# EAGLE board main_brd (EAGLE 6.5.0)
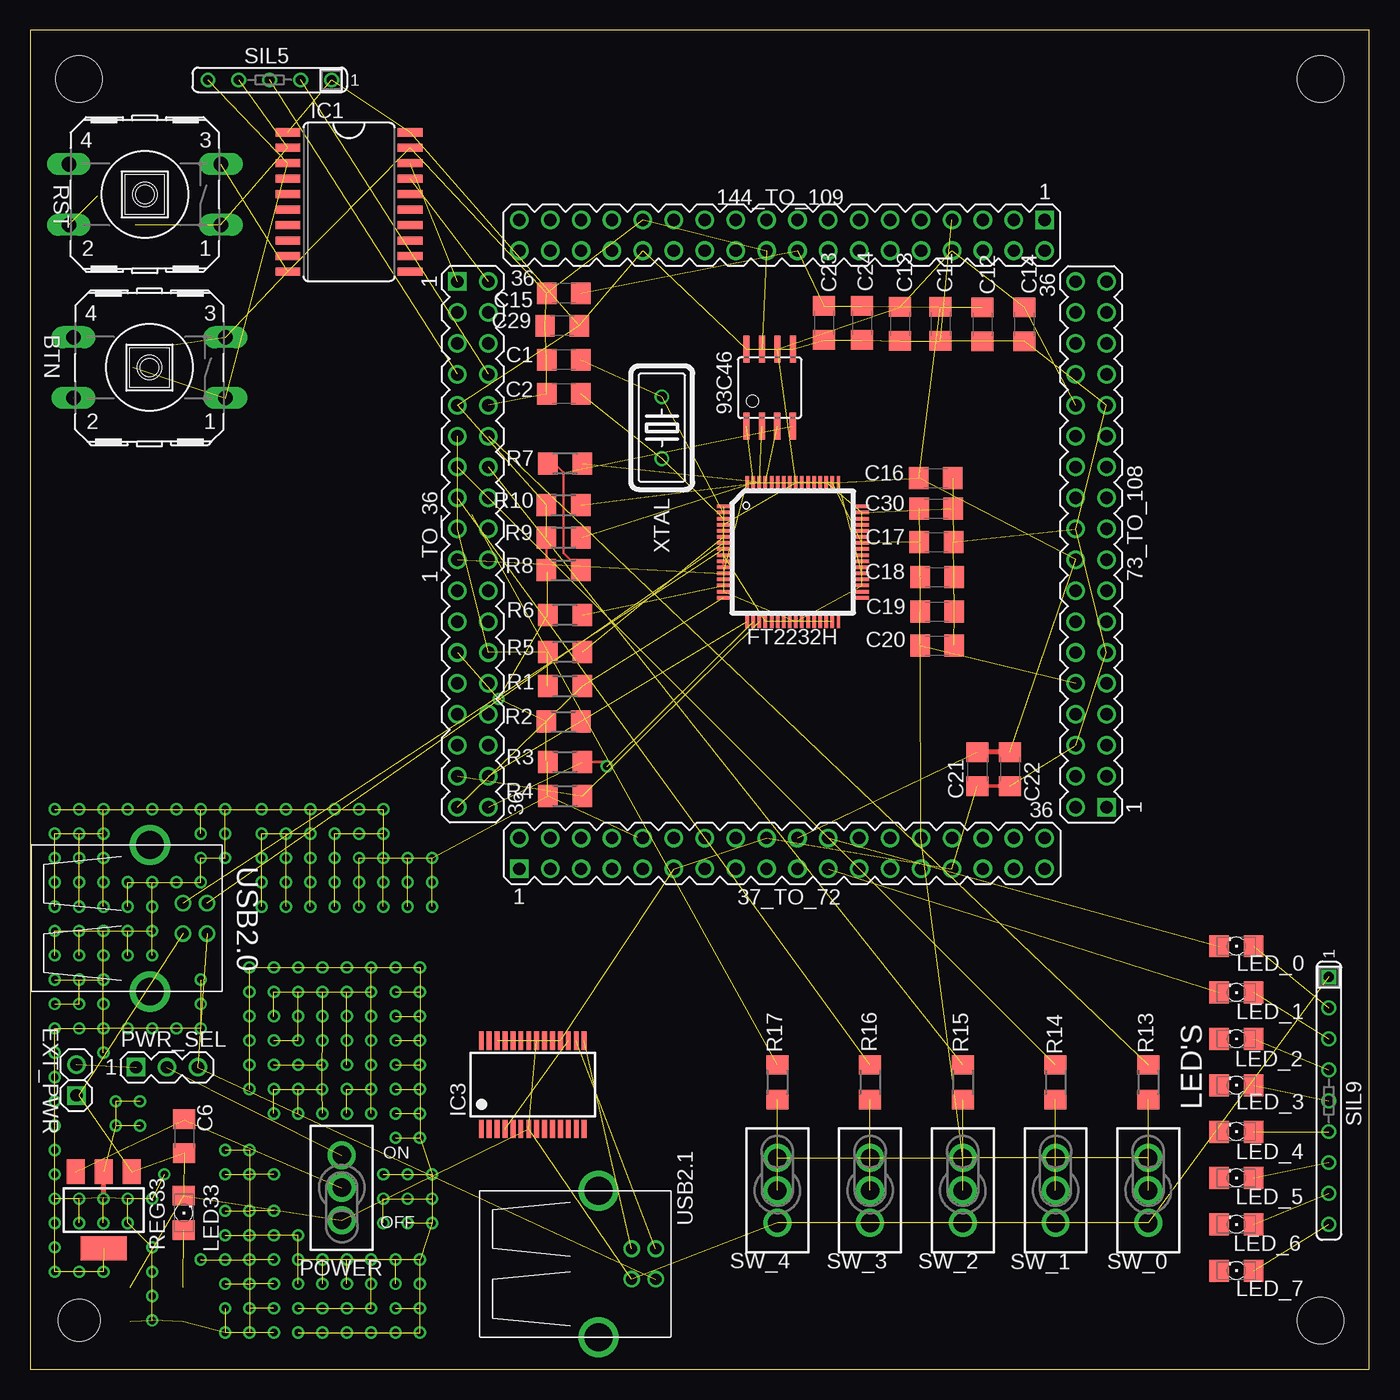
[diagram p0: board, top side]
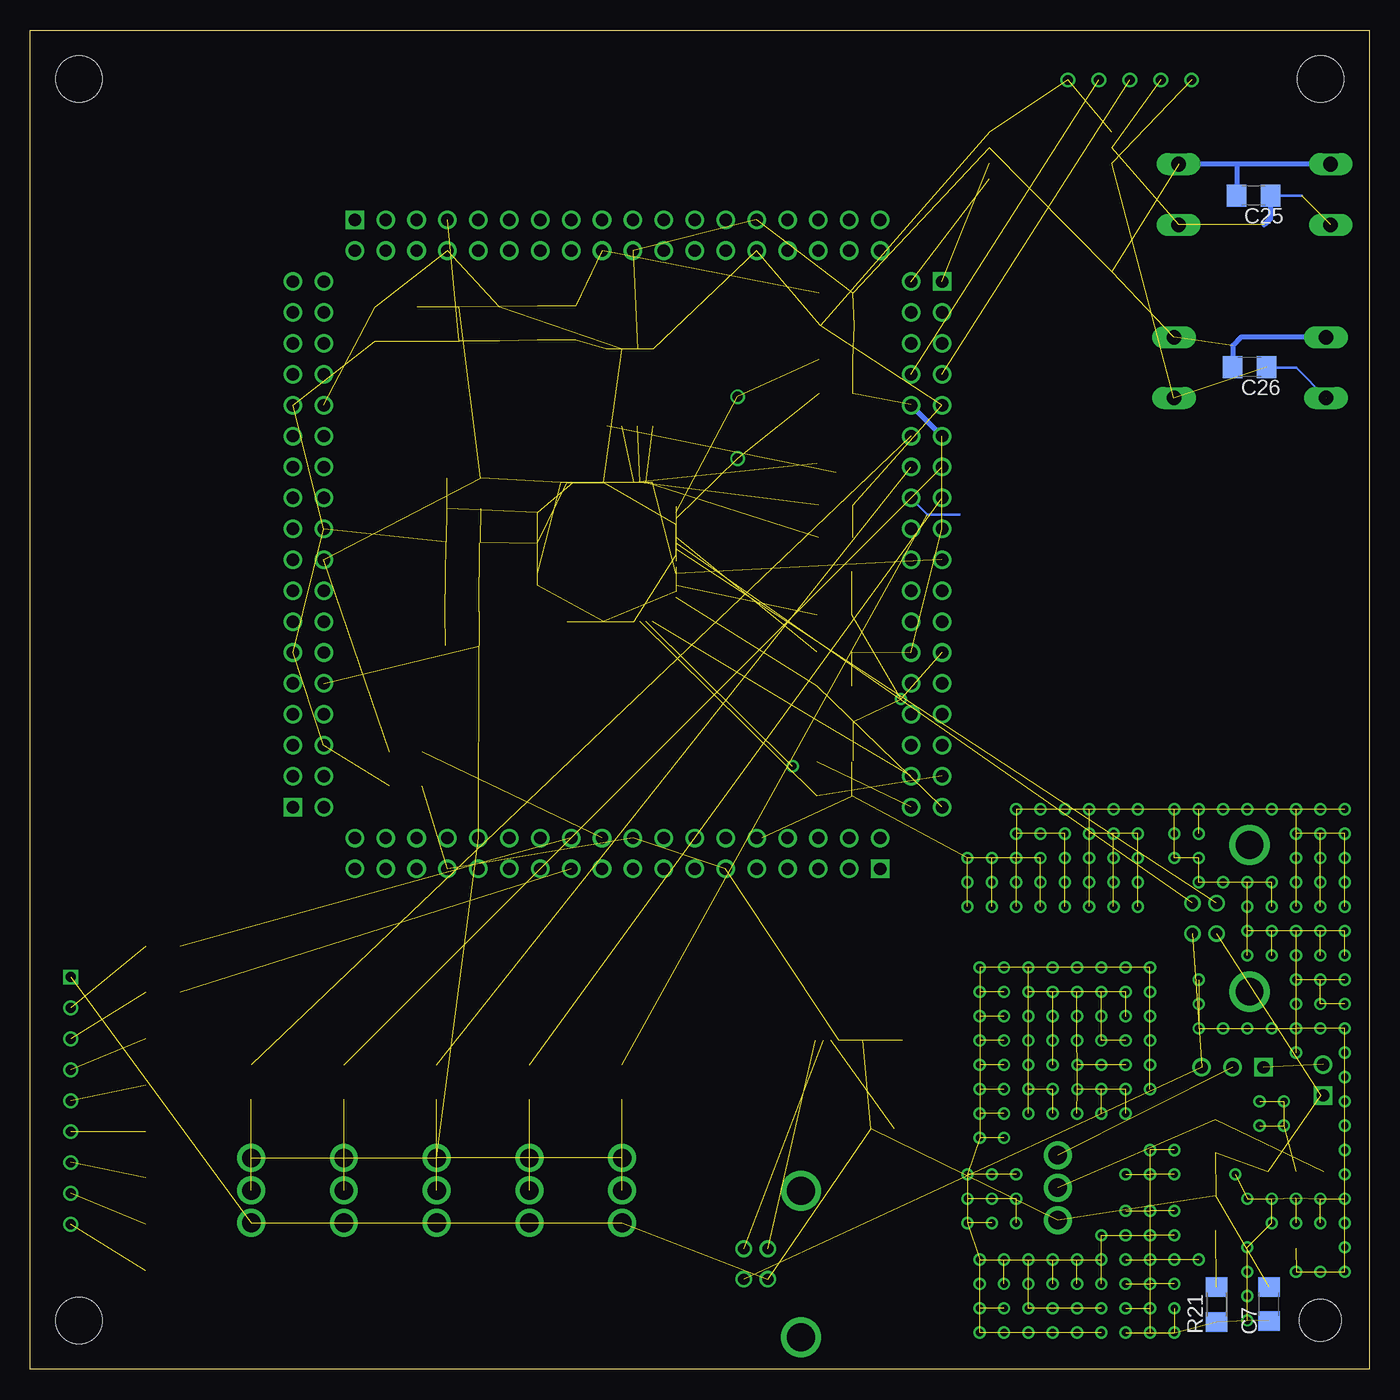
[diagram p1: board, bottom side, seen from below]

Size 110 x 110 mm. Coordinates in mm from the lower left corner, seen from the top.
Outline: 0,0 110,0 110,110 0,110 0,0
Copper layers (1*16): Top 0.07mm / dielectric 1.5mm / Bottom 0.07mm
Design rules "default *": minimum track width 8mil, minimum drill 23mil, track to track 10mil, track to pad 8mil, pad to pad 8mil, via to via 8mil, smd to smd 8mil, copper to edge 40mil, drill to drill 10mil, minimum pad ring 8mil, minimum via ring 8mil, stop-mask expansion 4mil, vias tented up to drill 0mil, thermal gap 10mil
Holes 3.43 mm at 4,4
Holes 3.81 mm at 106,4 106,106 4,106

## Footprints (pad centres in the part's own frame; a part is rotated, then mirrored left to right if it is on the bottom)
MA18-2 = drill 1.016 square: 1 -21.59,-1.27 | drill 1.016: 2 -21.59,1.27; 3 -19.05,-1.27; 4 -19.05,1.27; 5 -16.51,-1.27; 6 -16.51,1.27; 7 -13.97,-1.27; 8 -13.97,1.27; 9 -11.43,-1.27; 10 -11.43,1.27; 11 -8.89,-1.27; 12 -8.89,1.27; 13 -6.35,-1.27; 14 -6.35,1.27; 15 -3.81,-1.27; 16 -3.81,1.27; 17 -1.27,-1.27; 18 -1.27,1.27; 19 1.27,-1.27; 20 1.27,1.27; 21 3.81,-1.27; 22 3.81,1.27; 23 6.35,-1.27; 24 6.35,1.27; 25 8.89,-1.27; 26 8.89,1.27; 27 11.43,-1.27; 28 11.43,1.27; 29 13.97,-1.27; 30 13.97,1.27; 31 16.51,-1.27; 32 16.51,1.27; 33 19.05,-1.27; 34 19.05,1.27; 35 21.59,-1.27; 36 21.59,1.27
SOIC8 = smd 0.5 x 2.2: 1 -1.905,-3.154; 2 -0.645,-3.154; 3 0.625,-3.154; 4 1.895,-3.154; 5 1.905,3.154; 6 0.635,3.154; 7 -0.635,3.154; 8 -1.905,3.154
RACON12 = drill 1.194 long: 1 -6.248,2.489; 2 6.248,2.489; 3 -6.248,-2.489; 4 6.248,-2.489
C1206 = smd 1.6 x 1.8: 1 -1.4,0; 2 1.4,0
1X02 = drill 1.016 square: 1 -1.27,0 | drill 1.016: 2 1.27,0
LQFP_NEW = smd 1.1 x 0.285: 1 -5.7,3.75; 2 -5.7,3.25; 3 -5.7,2.75; 4 -5.7,2.25; 5 -5.7,1.75; 6 -5.7,1.25; 7 -5.7,0.75; 8 -5.7,0.25; 9 -5.7,-0.25; 10 -5.7,-0.75; 11 -5.7,-1.25; 12 -5.7,-1.75; 13 -5.7,-2.25; 14 -5.7,-2.75; 15 -5.7,-3.25; 16 -5.7,-3.75; 33 5.7,-3.75; 34 5.7,-3.25; 35 5.7,-2.75; 36 5.7,-2.25; 37 5.7,-1.75; 38 5.7,-1.25; 39 5.7,-0.75; 40 5.7,-0.25; 41 5.7,0.25; 42 5.7,0.75; 43 5.7,1.25; 44 5.7,1.75; 45 5.7,2.25; 46 5.7,2.75; 47 5.7,3.25; 48 5.7,3.75 | smd 0.285 x 1.1: 17 -3.75,-5.7; 18 -3.25,-5.7; 19 -2.75,-5.7; 20 -2.25,-5.7; 21 -1.75,-5.7; 22 -1.25,-5.7; 23 -0.75,-5.7; 24 -0.25,-5.7; 25 0.25,-5.7; 26 0.75,-5.7; 27 1.25,-5.7; 28 1.75,-5.7; 29 2.25,-5.7; 30 2.75,-5.7; 31 3.25,-5.7; 32 3.75,-5.7; 49 3.75,5.7; 50 3.25,5.7; 51 2.75,5.7; 52 2.25,5.7; 53 1.75,5.7; 54 1.25,5.7; 55 0.75,5.7; 56 0.25,5.7; 57 -0.25,5.7; 58 -0.75,5.7; 59 -1.25,5.7; 60 -1.75,5.7; 61 -2.25,5.7; 62 -2.75,5.7; 63 -3.25,5.7; 64 -3.75,5.7
SO20W = smd 0.66 x 2.032: 1 -5.715,-5.029; 2 -4.445,-5.029; 3 -3.175,-5.029; 4 -1.905,-5.029; 5 -0.635,-5.029; 6 0.635,-5.029; 7 1.905,-5.029; 8 3.175,-5.029; 9 4.445,-5.029; 10 5.715,-5.029; 11 5.715,5.029; 12 4.445,5.029; 13 3.175,5.029; 14 1.905,5.029; 15 0.635,5.029; 16 -0.635,5.029; 17 -1.905,5.029; 18 -3.175,5.029; 19 -4.445,5.029; 20 -5.715,5.029
SSOP28 = smd 0.4 x 1.5: 1 -4.225,-3.625; 2 -3.575,-3.625; 3 -2.925,-3.625; 4 -2.275,-3.625; 5 -1.625,-3.625; 6 -0.975,-3.625; 7 -0.325,-3.625; 8 0.325,-3.625; 9 0.975,-3.625; 10 1.625,-3.625; 11 2.275,-3.625; 12 2.925,-3.625; 13 3.575,-3.625; 14 4.225,-3.625; 15 4.225,3.625; 16 3.575,3.625; 17 2.925,3.625; 18 2.275,3.625; 19 1.625,3.625; 20 0.975,3.625; 21 0.325,3.625; 22 -0.325,3.625; 23 -0.975,3.625; 24 -1.625,3.625; 25 -2.275,3.625; 26 -2.925,3.625; 27 -3.575,3.625; 28 -4.225,3.625
1206 = smd 1.6 x 1.803: A -1.422,0; C 1.422,0
TL3XPO = drill 1.524 pad 2.032: 1 -2.667,0; 2 0,0; 3 2.667,0
MA03-1 = drill 1.016 square: 1 -2.54,0 | drill 1.016: 2 0,0; 3 2.54,0
R1206 = smd 1.6 x 1.803: 1 -1.422,0; 2 1.422,0
SOT223 = smd 1.5 x 2: 1 -2.3,-3.15; 2 0,-3.15; 3 2.3,-3.15 | smd 3.8 x 2: 4 0,3.15
SIL5 = drill 0.813: 1 -5.08,0; 2 -2.54,0; 3 0,0; 4 2.54,0; 5 5.08,0
SIL9 = drill 0.813 square: 1 -10.16,0 | drill 0.813: 2 -7.62,0; 3 -5.08,0; 4 -2.54,0; 5 0,0; 6 2.54,0; 7 5.08,0; 8 7.62,0; 9 10.16,0
USB-B-H = drill 0.914: D+ 0,1.25; D- 1.981,1.25; GND 0,-1.25; VBUS 1.981,-1.25 | drill 2.286: P$1 -2.718,-6.02; P$2 -2.718,6.02
HC18U-V = drill 0.813: 1 -2.54,0; 2 2.54,0

## Placement (x,y rotation side)
1_TO_36  [MA18-2]  36.36,67.77 270 top
37_TO_72  [MA18-2]  61.76,42.37 0 top
73_TO_108  [MA18-2]  87.16,67.77 90 top
93C46  [SOIC8]  60.74,80.65 0 top
144_TO_109  [MA18-2]  61.76,93.17 180 top
BTN  [RACON12]  9.78,82.3 180 top
C1  27pf  [C1206]  43.81,82.93 180 top
C2  27pf  [C1206]  43.81,80.14 180 top
C6  100nf  [C1206]  12.64,19.16 270 top
C7  100nf  [C1206]  8.22,5.33 90 bottom
C11  3.3uf  [C1206]  74.78,85.88 270 top
C12  3.3uf  [C1206]  78.23,85.85 270 top
C13  4.7uf  [C1206]  71.45,85.88 270 top
C14  4.7uf  [C1206]  81.66,85.85 270 top
C15  4.7uf  [C1206]  43.81,88.39 180 top
C16  4.7uf  [C1206]  74.4,73.23 0 top
C17  100nf  [C1206]  74.45,67.94 0 top
C18  100nf  [C1206]  74.5,65.07 0 top
C19  100nf  [C1206]  74.52,62.26 0 top
C20  100nf  [C1206]  74.5,59.46 0 top
C21  100nf  [C1206]  77.8,49.3 270 top
C22  100nf  [C1206]  80.49,49.3 270 top
C23  100nf  [C1206]  65.2,85.95 270 top
C24  100nf  [C1206]  68.33,85.95 270 top
C25  10uf  [C1206]  9.48,96.43 180 bottom
C26  10uf  [C1206]  9.82,82.33 180 bottom
C29  3.3uf  [C1206]  43.69,85.72 180 top
C30  3.3uf  [C1206]  74.42,70.71 0 top
EXT_PWR  [1X02]  3.77,23.76 90 top
FT2232H  FT2232H  [LQFP_NEW]  62.65,67.14 0 top
IC1  74LS245DW  [SO20W]  26.18,95.9 270 top
IC3  FT232RL  [SSOP28]  41.27,23.37 0 top
LED33  [1206]  12.61,12.83 90 top
LED_0  [1206]  99.1,34.75 180 top
LED_1  [1206]  99.1,30.94 180 top
LED_2  [1206]  99.1,27.13 180 top
LED_3  [1206]  99.1,23.32 180 top
LED_4  [1206]  99.1,19.51 180 top
LED_5  [1206]  99.1,15.7 180 top
LED_6  [1206]  99.1,11.89 180 top
LED_7  [1206]  99.1,8.08 180 top
POWER  [TL3XPO]  25.58,14.9 90 top
PWR_SEL  [MA03-1]  11.21,24.79 0 top
R1  1k  [R1206]  43.93,56.12 180 top
R2  10k  [R1206]  43.8,53.2 180 top
R3  10k  [R1206]  43.93,49.9 180 top
R4  10k  [R1206]  43.93,47.1 180 top
R5  12k  [R1206]  43.93,58.91 0 top
R6  1k  [R1206]  43.93,61.96 0 top
R7  2.2k  [R1206]  43.93,74.41 0 top
R8  10k  [R1206]  43.8,65.64 180 top
R9  10k  [R1206]  43.81,68.33 180 top
R10  10k  [R1206]  43.81,70.99 180 top
R13  10k  [R1206]  91.86,23.58 90 top
R14  10k  [R1206]  84.24,23.58 90 top
R15  10k  [R1206]  76.62,23.58 90 top
R16  10k  [R1206]  69,23.58 90 top
R17  10k  [R1206]  61.38,23.58 90 top
R21  470  [R1206]  12.53,5.3 90 bottom
REG33  [SOT223]  6.03,13.07 180 top
RST  [RACON12]  9.4,96.52 180 top
SIL5  10k  [SIL5]  19.66,105.93 180 top
SIL9  470  [SIL9]  106.69,22.05 270 top
SW_0  [TL3XPO]  91.86,14.69 270 top
SW_1  [TL3XPO]  84.24,14.69 270 top
SW_2  [TL3XPO]  76.62,14.69 270 top
SW_3  [TL3XPO]  69,14.69 270 top
SW_4  [TL3XPO]  61.38,14.69 270 top
USB2.0  [USB-B-H]  12.53,37.04 0 top
USB2.1  [USB-B-H]  49.4,8.64 0 top
XTAL  16MHz  [HC18U-V]  51.88,77.35 90 top

## Library data of the parts
1_TO_36 37_TO_72 73_TO_108 144_TO_109 PWR_SEL = con-lstb; OC_FARNELL: unknown; OC_NEWARK: unknown
93C46 = atmel
BTN RST = switch-misc
C1 C2 C6 C7 C25 C26 R1-R10 R13-R17 R21 = resistor
C11-C24 C29 C30 = rcl
EXT_PWR = pinhead
FT2232H = ft2232h_lqfp64
IC1 = 74xx-us
IC3 = ftdichip; MPN: FT232RL; OC_FARNELL: 1146032; OC_NEWARK: 91K9918
LED33 LED_0 LED_1-LED_7 = led
POWER SW_0 SW_1-SW_4 = switch
REG33 = v-reg
SIL5 = resistor-sil; OC_FARNELL: unknown; OC_NEWARK: unknown
SIL9 = resistor-sil
USB2.0 USB2.1 = con-usb-3
XTAL = crystal; OC_FARNELL: unknown; OC_NEWARK: unknown

## Nets
32: 1_TO_36.32
49: LED_7.C
50: LED_6.C
51: LED_5.C
52: LED_4.C
53: LED_3.C
55: LED_2.C
57: 37_TO_72.21 LED_1.C
58: 37_TO_72.22 LED_0.C
59: 37_TO_72.23
60: 37_TO_72.24
61: 37_TO_72.25
62: 37_TO_72.26
63: 37_TO_72.27
66: 37_TO_72.30
67: 37_TO_72.31
68: 37_TO_72.32
70: 37_TO_72.34
72: 37_TO_72.36
124: 144_TO_109.16
125: 144_TO_109.17
BTN: BTN.1 BTN.2 C26.1 IC1.3 SIL5.5
BTN_0: 1_TO_36.1 IC1.18
BTN_1: 1_TO_36.2 IC1.17
CLK_1: 1_TO_36.18
D+: FT2232H.8 USB2.0.D+
D-: FT2232H.7 USB2.0.D-
EECLK: 93C46.2 FT2232H.62 R10.1
EECS: 93C46.1 FT2232H.63 R9.1
EEDATA: 93C46.3 FT2232H.61 R7.2
EN_0: 144_TO_109.22
EN_1: 144_TO_109.36
EN_2: 37_TO_72.1
EN_3: 37_TO_72.15
EN_4: 144_TO_109.25
EN_5: 144_TO_109.30
EN_6: 144_TO_109.33
EN_7: 37_TO_72.4
EN_8: 37_TO_72.7
EN_9: 37_TO_72.12
ENC_A_0: 73_TO_108.25
ENC_A_1: 73_TO_108.23
ENC_A_2: 73_TO_108.21
ENC_A_3: 73_TO_108.16
ENC_A_4: 73_TO_108.14
ENC_A_5: 73_TO_108.12
ENC_A_6: 73_TO_108.8
ENC_A_7: 73_TO_108.5
ENC_A_8: 73_TO_108.3
ENC_A_9: 73_TO_108.1
ENC_B_0: 73_TO_108.26
ENC_B_1: 73_TO_108.24
ENC_B_2: 73_TO_108.22
ENC_B_3: 73_TO_108.19
ENC_B_4: 73_TO_108.15
ENC_B_5: 73_TO_108.13
ENC_B_6: 73_TO_108.9
ENC_B_7: 73_TO_108.7
ENC_B_8: 73_TO_108.4
ENC_B_9: 73_TO_108.2
GND: 1_TO_36.10 1_TO_36.11 1_TO_36.17 1_TO_36.26 37_TO_72.11 37_TO_72.18 37_TO_72.29 73_TO_108.6 73_TO_108.11 73_TO_108.20 73_TO_108.27 93C46.5 93C46.7 144_TO_109.7 144_TO_109.20 144_TO_109.27 BTN.3 BTN.4 C1.2 C2.2 C6.2 C7.2 C11.2 C12.2 C13.2 C14.2 C15.2 C16.2 C17.2 C18.2 C19.2 C20.2 C21.2 C22.2 C23.2 C24.2 C25.2 C26.2 C29.2 C30.2 EXT_PWR.1 FT2232H.1 FT2232H.5 FT2232H.10 FT2232H.11 FT2232H.13 FT2232H.15 FT2232H.25 FT2232H.35 FT2232H.47 FT2232H.51 IC1.10 IC1.19 IC3.7 IC3.18 IC3.21 IC3.25 IC3.26 LED33.C POWER.1 R1.2 R5.1 REG33.1 RST.3 RST.4 SIL9.1 SW_0.3 SW_1.3 SW_2.3 SW_3.3 SW_4.3 USB2.0.GND USB2.1.GND
LED_0: 1_TO_36.20
LED_1: 1_TO_36.21
LED_2: 1_TO_36.22
LED_3: 1_TO_36.23
LED_4: 1_TO_36.24
LED_5: 1_TO_36.27
LED_6: 1_TO_36.28
LED_7: 1_TO_36.30
MISO_H: 144_TO_109.15
MISO_S: 1_TO_36.3
MOSI_H: 144_TO_109.14
MOSI_S: 1_TO_36.4
N$1: C1.1 FT2232H.2 XTAL.2
N$2: IC3.15 USB2.1.D+
N$3: LED33.A R21.2
N$4: IC3.16 USB2.1.D-
N$5: FT2232H.6 R5.2
N$6: FT2232H.14 R6.2
N$7: IC3.20
N$8: IC3.4 IC3.17
N$9: 93C46.4 R7.1 R8.1
N$19: LED_0.A SIL9.2
N$21: LED_4.A SIL9.6
N$22: LED_6.A SIL9.8
N$23: LED_1.A SIL9.3
N$24: LED_3.A SIL9.5
N$25: LED_5.A SIL9.7
N$26: LED_7.A SIL9.9
N$28: R13.1 SW_0.2
N$30: R14.1 SW_1.2
N$31: R15.1 SW_2.2
N$32: R16.1 SW_3.2
N$33: R17.1 SW_4.2
N$40: EXT_PWR.2 PWR_SEL.1
OSCO: C2.1 FT2232H.3 XTAL.1
PWM_F_0: 144_TO_109.21
PWM_F_1: 144_TO_109.35
PWM_F_2: 37_TO_72.2
PWM_F_3: 37_TO_72.16
PWM_F_4: 144_TO_109.24
PWM_F_5: 144_TO_109.29
PWM_F_6: 144_TO_109.32
PWM_F_7: 37_TO_72.5
PWM_F_8: 37_TO_72.8
PWM_F_9: 37_TO_72.13
PWM_R_0: 144_TO_109.19
PWM_R_1: 144_TO_109.34
PWM_R_2: 37_TO_72.3
PWM_R_3: 37_TO_72.17
PWM_R_4: 144_TO_109.23
PWM_R_5: 144_TO_109.26
PWM_R_6: 144_TO_109.31
PWM_R_7: 37_TO_72.6
PWM_R_8: 37_TO_72.9
PWM_R_9: 37_TO_72.14
RST: C25.1 IC1.2 RST.1 RST.2 SIL5.4
RX: 1_TO_36.29
SCK_H: 144_TO_109.13
SCK_S: 1_TO_36.5
SCL_H: 37_TO_72.33
SCL_S: 1_TO_36.7 SIL5.3
SDA_H: 37_TO_72.35
SDA_S: 1_TO_36.8 SIL5.2
SIL10: LED_2.A SIL9.4
SS_H_0: 144_TO_109.12
SS_H_1: 144_TO_109.11
SS_H_2: 37_TO_72.19
SS_S: 1_TO_36.6
SW_0: 1_TO_36.12 R13.2
SW_1: 1_TO_36.13 R14.2
SW_2: 1_TO_36.14 R15.2
SW_3: 1_TO_36.15 R16.2
SW_4: 1_TO_36.16 R17.2
TCK: 1_TO_36.35 FT2232H.16 R1.1
TDI: 1_TO_36.34 FT2232H.17 R2.1
TDO: 1_TO_36.36 FT2232H.18 R3.1
TMS: 1_TO_36.33 FT2232H.19 R4.1
TX: 1_TO_36.31
US_E_0: 73_TO_108.36
US_E_1: 73_TO_108.35
US_E_2: 73_TO_108.34
US_E_3: 73_TO_108.33
US_E_4: 73_TO_108.32
US_E_5: 73_TO_108.31
US_E_6: 73_TO_108.30
US_E_7: 73_TO_108.29
US_T_0: 144_TO_109.10
US_T_1: 144_TO_109.9
US_T_2: 144_TO_109.6
US_T_3: 144_TO_109.5
US_T_4: 144_TO_109.4
US_T_5: 144_TO_109.3
US_T_6: 144_TO_109.2
US_T_7: 144_TO_109.1
VBUS: PWR_SEL.3 USB2.0.VBUS USB2.1.VBUS
VCC: C6.1 POWER.2 REG33.3
VCCINT: 1_TO_36.19 37_TO_72.20 73_TO_108.18 144_TO_109.18 C11.1 C12.1 C15.1 C16.1 C21.1 C22.1 C23.1 C24.1 FT2232H.12 FT2232H.37 FT2232H.49 FT2232H.64
VCCIO: 1_TO_36.9 1_TO_36.25 37_TO_72.10 37_TO_72.28 73_TO_108.10 73_TO_108.28 93C46.6 93C46.8 144_TO_109.8 144_TO_109.28 C7.1 C13.1 C14.1 C17.1 C18.1 C19.1 C20.1 C29.1 C30.1 FT2232H.4 FT2232H.9 FT2232H.20 FT2232H.31 FT2232H.42 FT2232H.50 FT2232H.56 IC1.1 IC1.20 R2.2 R3.2 R4.2 R6.1 R8.2 R9.2 R10.2 R21.1 REG33.4 SIL5.1 SW_0.1 SW_1.1 SW_2.1 SW_3.1 SW_4.1
XXX: POWER.3 PWR_SEL.2

## Tracks (layer width: path | path; a pad name or v marks a point on that pad's centre or on a via)
57  (1 unrouted)
58  (1 unrouted)
BTN  (4 unrouted)
  Bottom 0.203: 3.5,79.81 5.99,82.3 8.38,82.3 C26.1
BTN_0  (1 unrouted)
BTN_1  (1 unrouted)
D+  (1 unrouted)
D-  (1 unrouted)
EECLK  (2 unrouted)
EECS  (2 unrouted)
EEDATA  (2 unrouted)
EN_1
  Top 0.203: 144_TO_109.36 40.13,91.95
GND  (66 unrouted)
  Top 0.203: 1_TO_36.10 37.64,79.25 | FT2232H.10 FT2232H.11
  Top 0.305: C21.2 C22.2
  Top 0.406: 3.98,22.49 EXT_PWR.1 | 73_TO_108.6 85.81,51.18
  Bottom 0.406: 1_TO_36.11 1_TO_36.10 | RST.4 10.92,99.01 | 10.92,99.01 RST.3 | C25.2 10.88,98.97 10.92,99.01 | C26.2 11.21,84.11 10.54,84.78 BTN.4
N$1  (2 unrouted)
N$2  (1 unrouted)
N$3  (1 unrouted)
N$4  (1 unrouted)
N$5  (1 unrouted)
N$6  (1 unrouted)
N$8  (1 unrouted)
N$9  (1 unrouted)
  Top 0.203: R7.1 43.07,74.41 43.81,73.66 43.81,67.05 R8.1
N$19  (1 unrouted)
N$21  (1 unrouted)
N$22  (1 unrouted)
N$23  (1 unrouted)
N$24  (1 unrouted)
N$25  (1 unrouted)
N$26  (1 unrouted)
N$28  (1 unrouted)
N$30  (1 unrouted)
N$31  (1 unrouted)
N$32  (1 unrouted)
N$33  (1 unrouted)
N$40  (1 unrouted)
OSCO  (2 unrouted)
RST  (4 unrouted)
  Bottom 0.203: 5.54,96.42 8.08,96.42 C25.1
  Bottom 0.406: 8.61,94.03 8.1,94.54 8.1,96.41 C25.1
SCL_S  (1 unrouted)
SDA_S  (1 unrouted)
SIL10  (1 unrouted)
SW_0  (1 unrouted)
SW_1  (1 unrouted)
SW_2  (1 unrouted)
SW_3  (1 unrouted)
SW_4  (1 unrouted)
  Bottom 0.203: 33.66,70.23 36.28,70.23 1_TO_36.16
TCK  (2 unrouted)
TDI  (2 unrouted)
TDO  (via drill 0.6)  (2 unrouted)
  Top 0.203: R3.1 47.01,49.9 v47.37,49.53
TMS  (2 unrouted)
VBUS  (2 unrouted)
VCC  (2 unrouted)
  Top 0.203: C6.1 12.65,20.47
VCCINT  (14 unrouted)
  Top 0.406: C22.1 C21.1
VCCIO  (via drill 0.58, 0.6)  (278 unrouted)
  Top 0.203: 49.89,43.69 50.29,43.69 37_TO_72.10 | R9.2 42.39,65.66 R8.2 42.51,65.52 | C20.1 73.15,59.41 | R3.2 42.38,50.02
  Top 0.406: 6.02,14.07 6.02,16.23 | IC1.1 20.84,101.62 20.83,101.6 | C17.1 73.1,67.89 | C19.1 73.1,62.23 | C18.1 73.12,65.05
  Bottom 0.203: 35.1,58.88 1_TO_36.25
  other vias: 4,30 4,32 2,30 20,27 22,27 19,44 21,44 23,44 25,44 27,44 29,44 33,42 31,42 29,42 27,42 25,42 23,42 21,42 19,40 19,42 21,40 23,40 23,38 25,40 27,40 29,40 31,40 33,40 33,38 31,38 29,38 27,38 25,38 21,38 19,38 32,33 30,33 28,33 26,33 24,33 22,33 20,33 18,33 18,31 20,31 22,31 24,31 26,31 28,31 30,31 32,31 32,29 30,29 28,29 26,29 24,29 22,29 20,29 18,29 27,46 38.46,55.07 29,46 19,46 23,46 25,46 21,46 32,27 30,27 28,27 26,27 24,27 18,27 18,25 20,25 22,25 26,25 30,25 32,25 22,23 20,23 18,23 20,21 22,21 24,21 26,21 32,19 29,14 31,14 33,14 33,12 31,12 29,12 32,9 30,9 28,9 26,9 24,9 22,9 22,11 32,7 32,5 32,3 30,3 30,5 30,7 28,7 28,5 28,3 26,3 26,5 26,7 24,7 24,5 24,3 22,7 20,7 18,7 16,7 22,5 20,5 18,5 16,5 16,3 18,3 20,3 22,3 20,13 20,11 20,9 18,13 16,13 16,11 16,9 18,11 18,9 14,9 16,18 16,16 18,16 20,16 7,22 9,22 7,20 9,20 6,46 8,46 10,46 12,46 14,46 16,46 16,44 16,42 14,42 14,44 14,40 12,40 10,40 10,38 10,36 10,34 14,32 14,28 14,30 12,28 10,28 8,28 6,28 6,26 6,30 4,28 2,26 2,28 2,32 6,32 2,44 4,44 6,44 6,42 4,42 2,42 2,40 4,40 6,40 8,40 8,38 6,38 4,38 2,38 2,36 4,36 6,36 8,36 8,34 6,34 4,34 2,34 2,24 2,22 2,20 2,18 2,16 2,14 2,12 2,10 2,8 4,8 4,14 6,14 8,14 8,12 6,12 4,12 10,14 11,16 6,8 10,10 10,8 10,6 10,4 23.98,24.99 28,25 23.98,22.99 26,23 28,23 30,23 32,23 28,21 30,21 32,21 30,19 29,16 33,16 31,16 18,18 2,46 4,46
XXX  (1 unrouted)

## Text on the board
tNames: LED'S | ON | OFF